# Altium PCB Fibras2Reles.PcbDoc
Units mm, origin at the board's own origin, x right, y up, seen from the top; angles counter-clockwise.
Board outline 87.91 x 91.56 mm, 2 copper layers (Top Layer, Bottom Layer), stack 0.971 mm thick; 75 components, 50 nets, 231 pads, 38 vias.
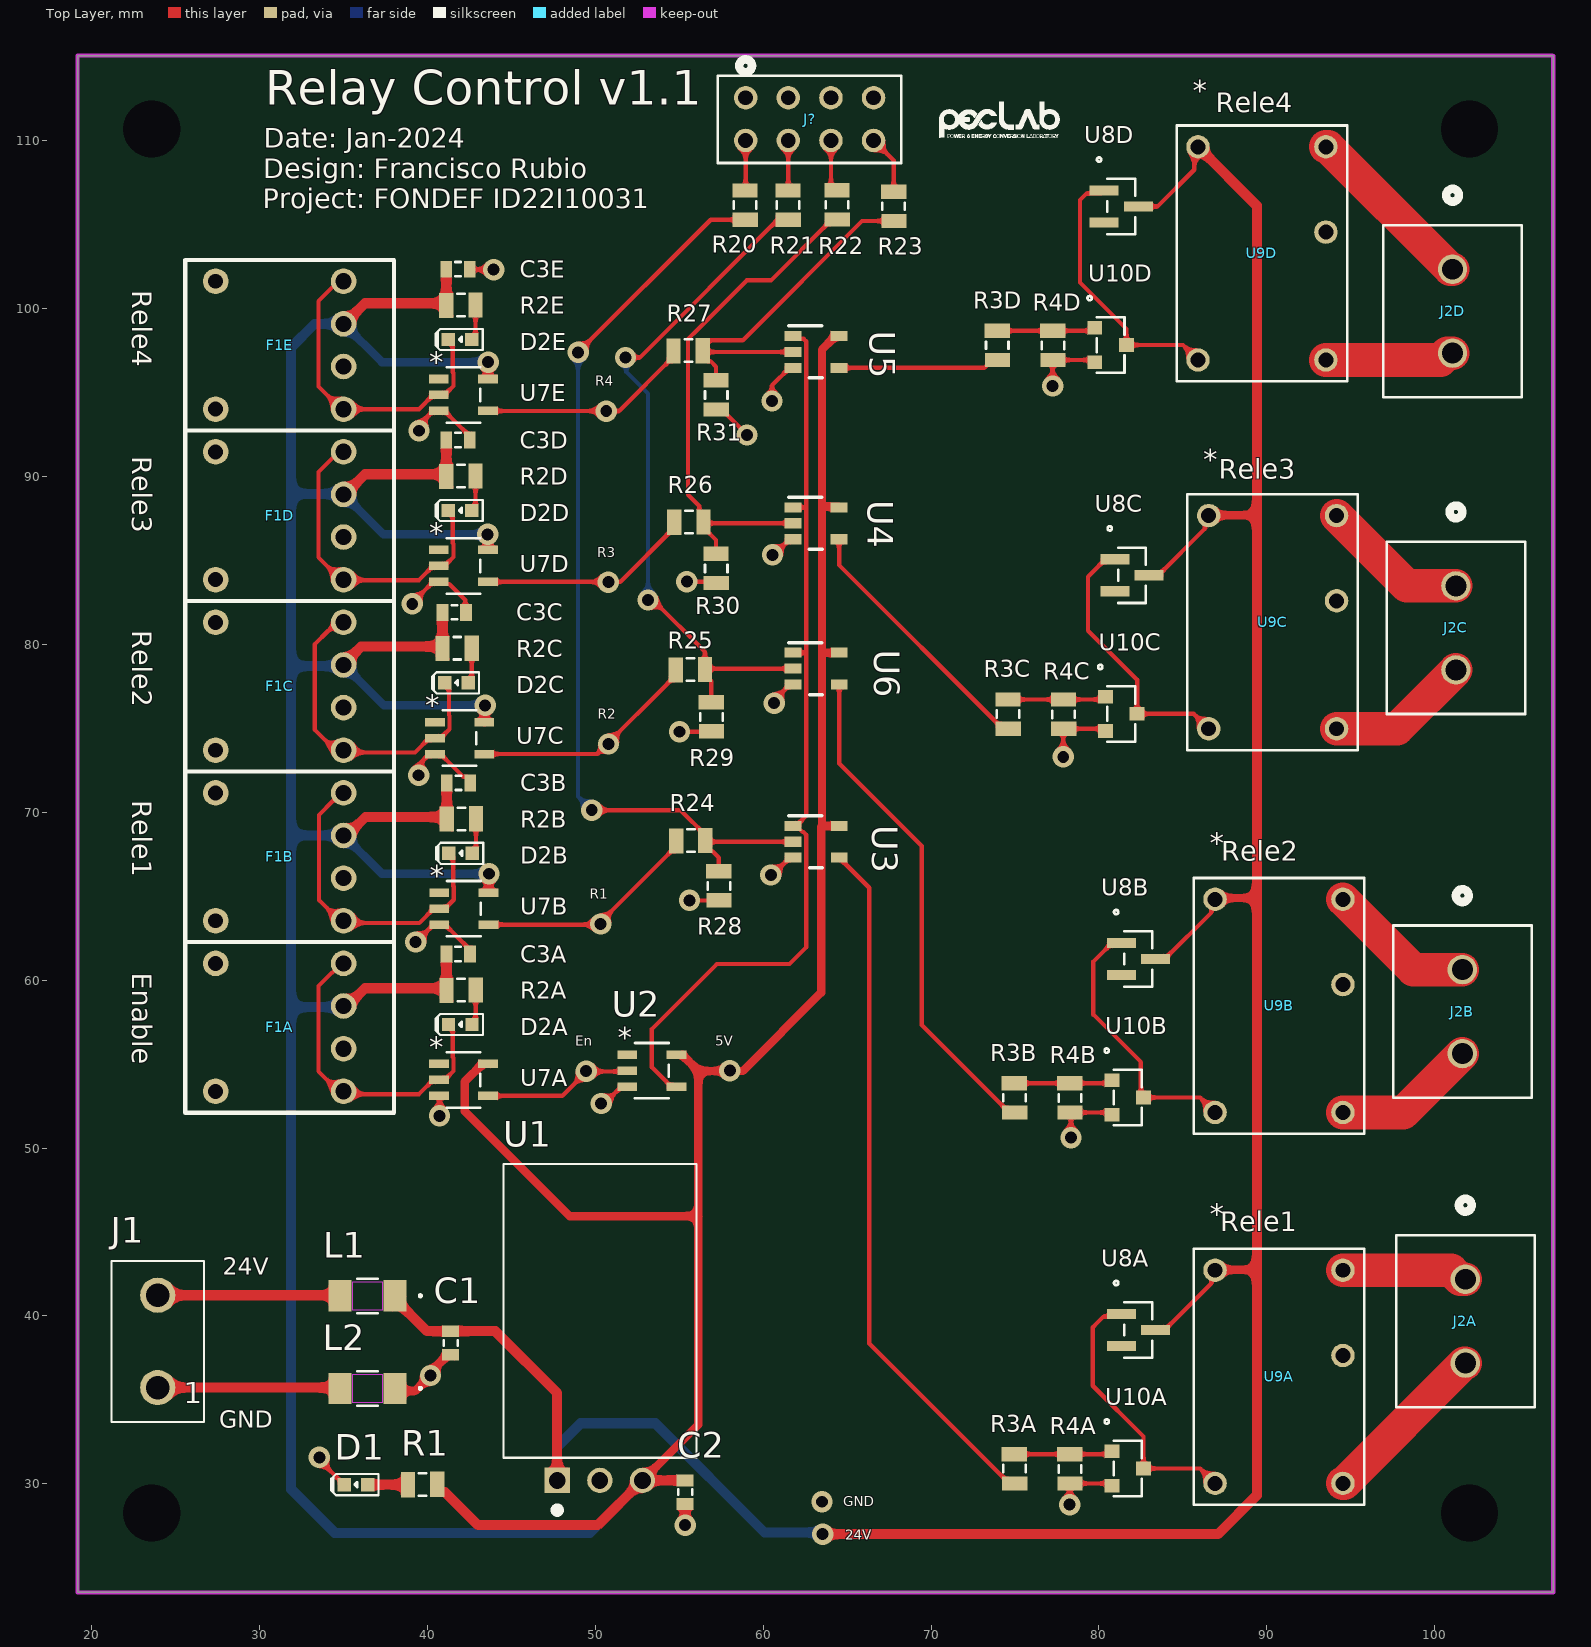
[diagram p0: Top Layer view]
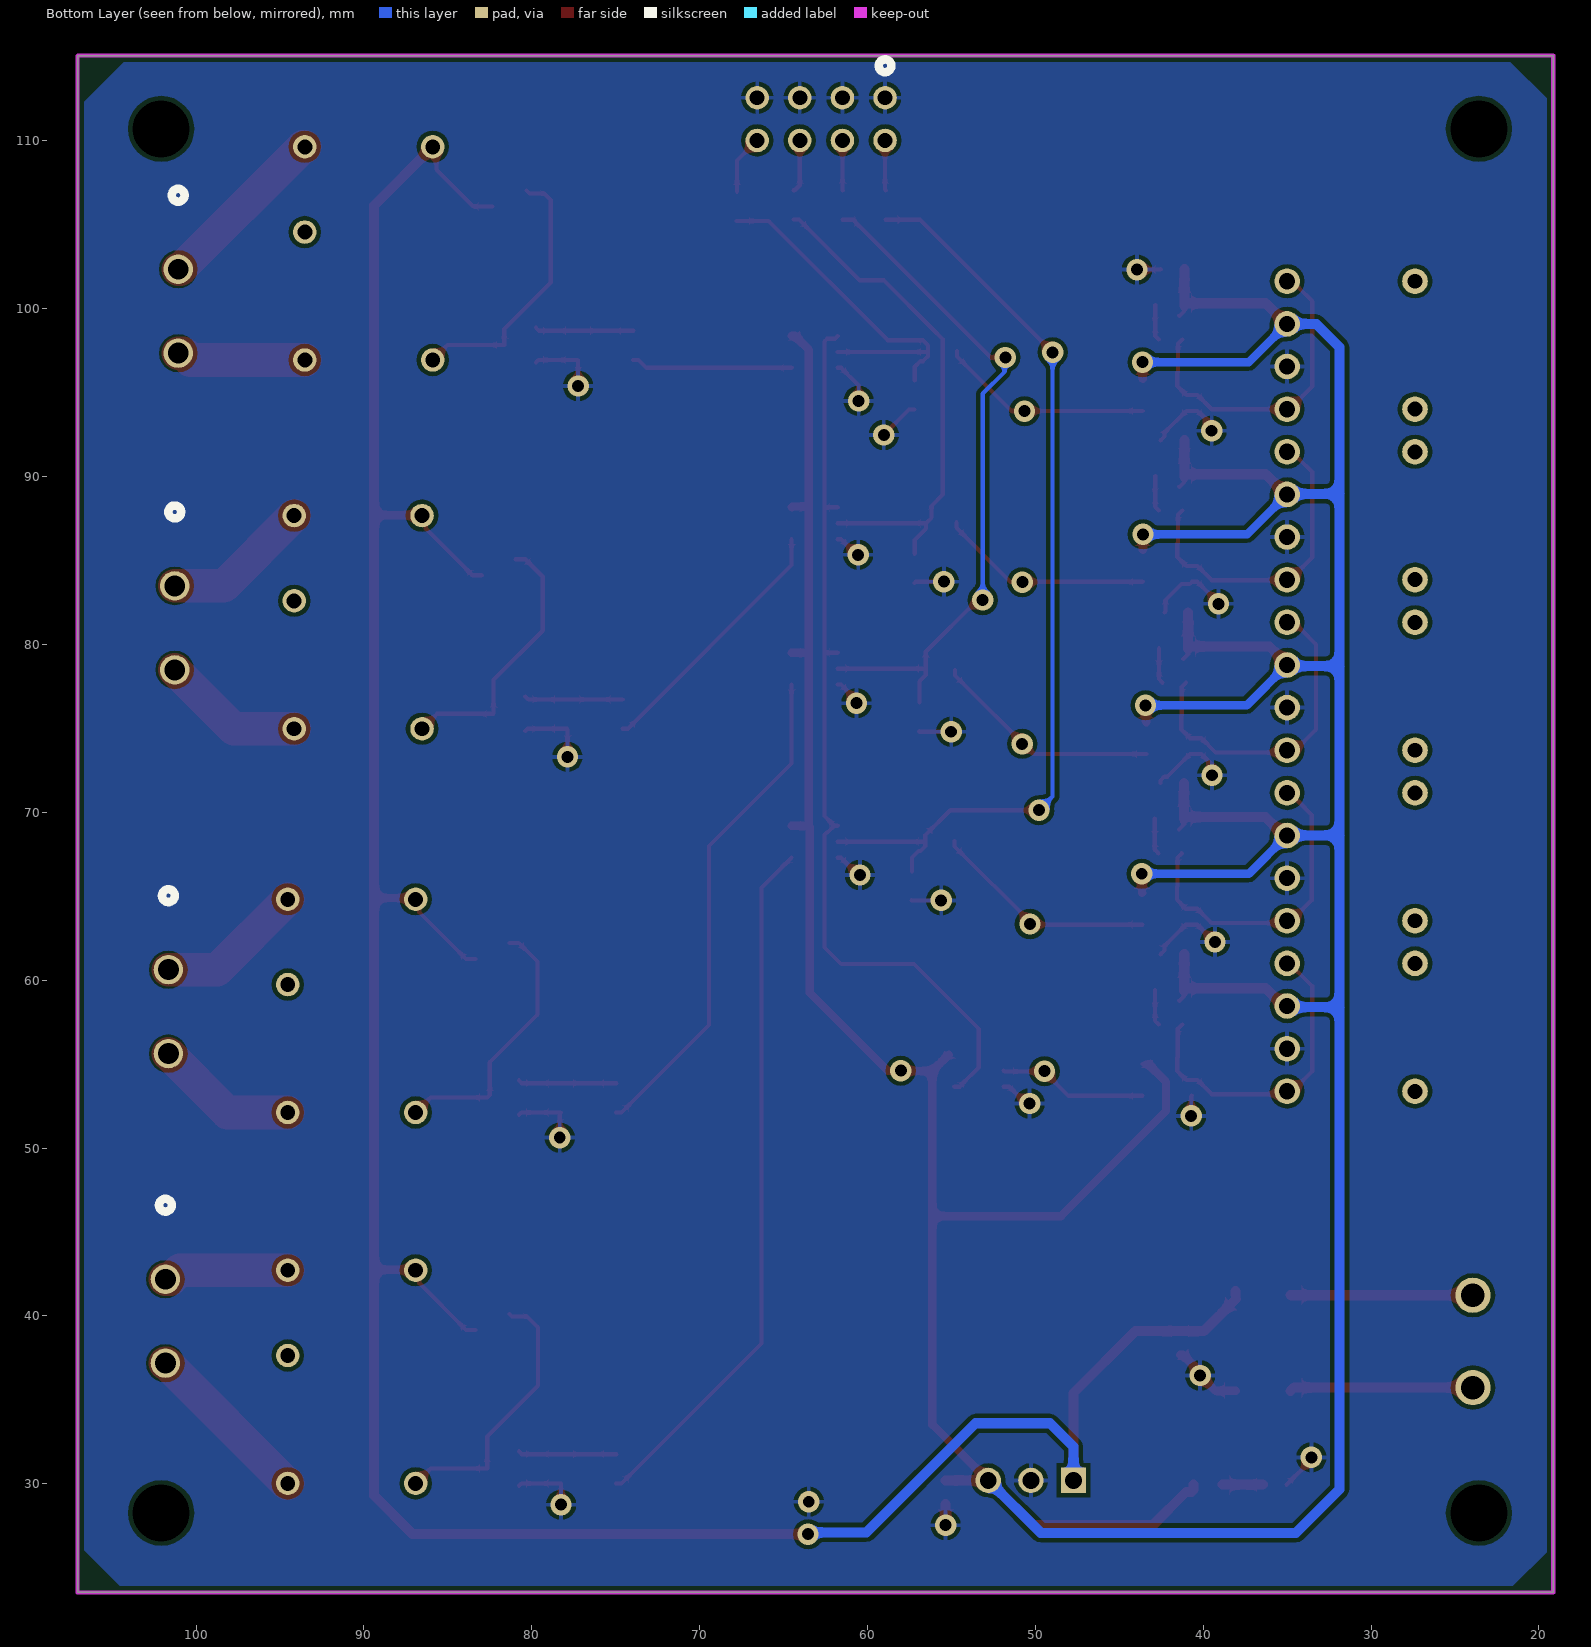
[diagram p1: Bottom Layer view, seen from below]
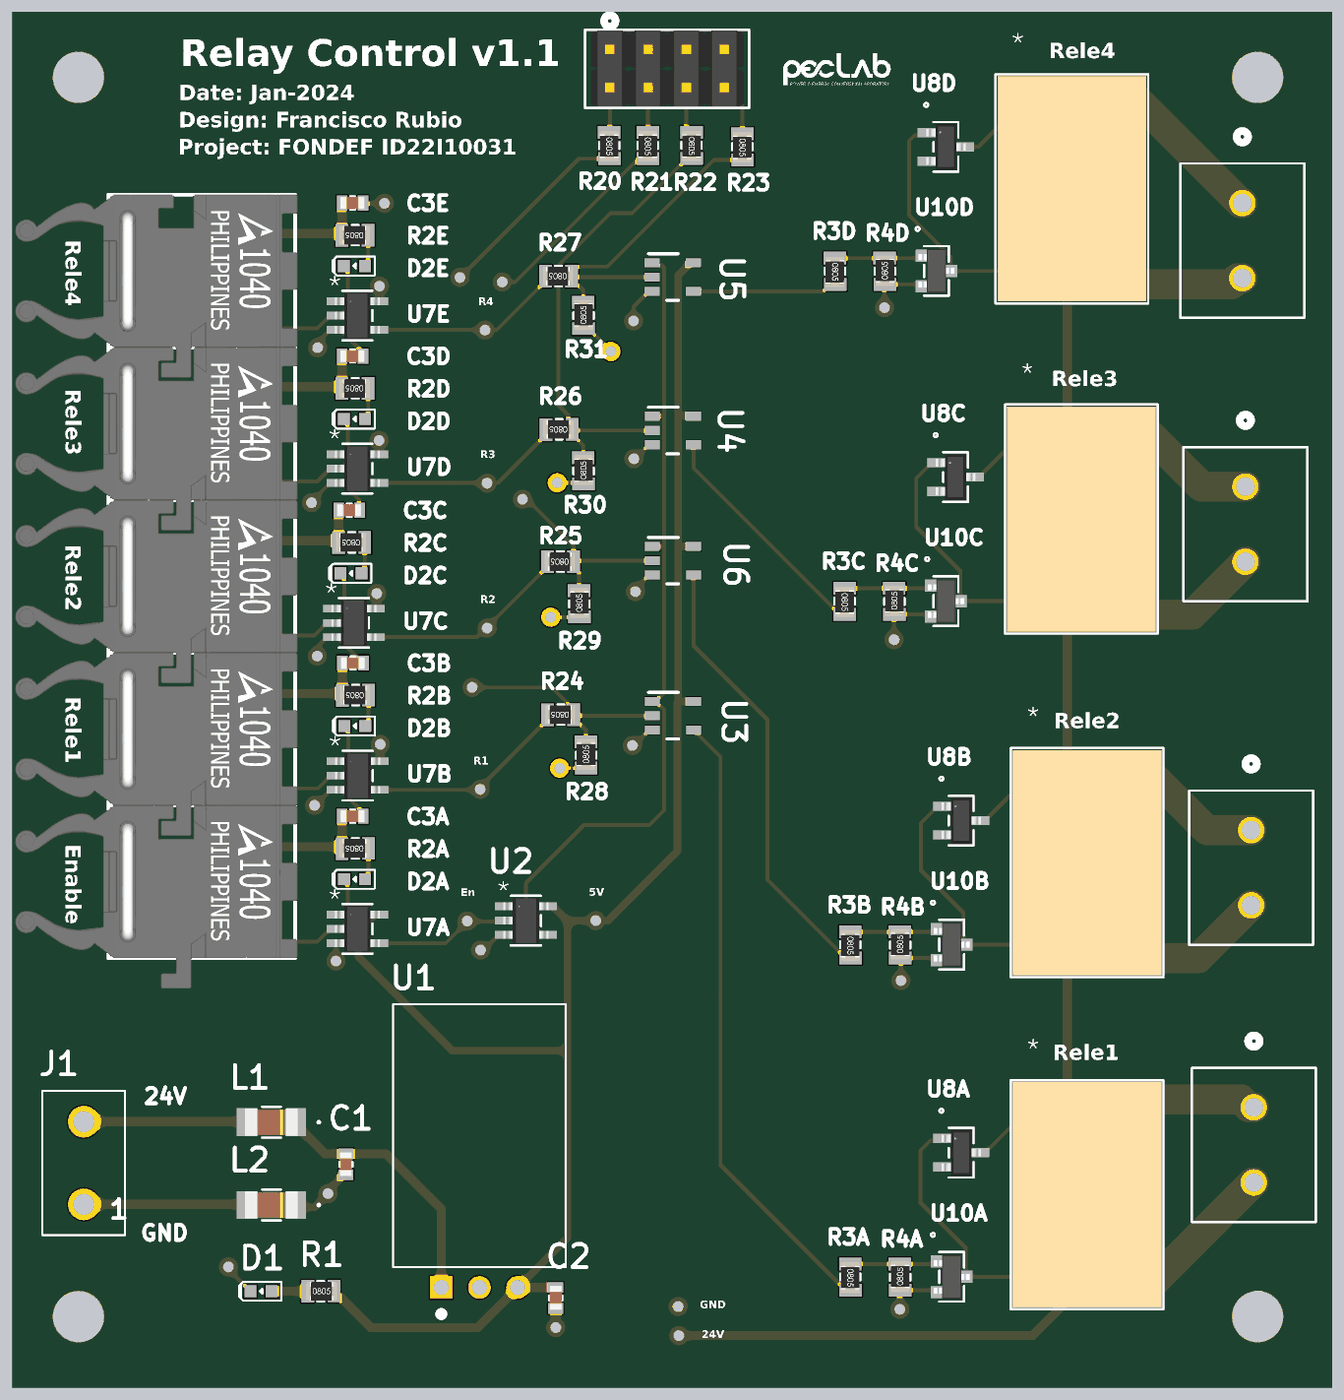
[diagram p2: 3D render of the assembled board from above, using the file's embedded part models]

## Layer stack, top to bottom
Top Solder: solder mask 0.0102, Solder Resist, Dk 3.5
Top Layer: signal copper 0.0356
Dielectric2: dielectric 0.9, FR-4, Dk 4.8
Bottom Layer: signal copper 0.0356
Bottom Solder: solder mask 0.0102, Solder Resist, Dk 3.5

## Board outline
19.152,23.527 19.152,115.087 107.036,115.087 107.061,115.062 107.061,23.527

## Design rules (kind name [scope] priority, off if disabled: settings)
Clearance [All] p1: gap=0.254 ignorepadtopadclearanceinfootprint=FALSE except(0: Arc-Hole Track-Hole SMDPad-Hole THPad-Hole Via-Hole Fill-Hole Poly-Hole Region-Hole Text-Hole; 0.152: Arc-Arc Arc-Track Arc-SMDPad Track-Track Track-SMDPad)
HoleSize [All] p1: absolutevalues=TRUE maxlimit=5 minlimit=0.025 maxpercent=80.000 minpercent=20.000
PolygonConnect [All] p1: connectstyle=Relief reliefconductorwidth=0.254 reliefentries=4 polygonreliefangle="90 Angle" airgapwidth=0.254
RoomDefinition RelesOut4 [InComponentClass('RelesOut4')] p1: confinementstyle=ConfineIn formatcopy=TRUE lockcomponents=FALSE outline 70.028,94.285 105.969,94.285 105.969,114.351 70.028,114.351
RoomDefinition RelesOut3 [InComponentClass('RelesOut3')] p2: confinementstyle=ConfineIn formatcopy=TRUE lockcomponents=FALSE outline 70.663,72.314 106.604,72.314 106.604,92.38 70.663,92.38
RoomDefinition RelesOut2 [InComponentClass('RelesOut2')] p3: confinementstyle=ConfineIn formatcopy=TRUE lockcomponents=FALSE outline 71.044,49.454 106.985,49.454 106.985,69.52 71.044,69.52
RoomDefinition RelesOut1 [InComponentClass('RelesOut1')] p4: confinementstyle=ConfineIn formatcopy=TRUE lockcomponents=FALSE outline 71.044,27.356 106.985,27.356 106.985,47.422 71.044,47.422
RoutingVias [All] p1: holewidth=0.711 width=1.27 viastyle="Through Hole" minholewidth=0.711 minwidth=1.27 maxholewidth=0.711 maxwidth=1.27
SolderMaskExpansion [All] p1: expansion=0.102 istentingtop=FALSE
Width [All] p1: maxlimit=3 minlimit=0.254 preferedwidth=0.5 minimp=50.000000 maximp=50.000000 favimp=50.000000
29 further rules are at their usual default settings.

## Classes and differential pairs
channel class RelesOut: RelesOut1 RelesOut2 RelesOut3 RelesOut4
channel class InputsFibras: InputsFibras1 InputsFibras2 InputsFibras3 InputsFibras4 InputsFibras5
net class Rele_Vgs[1..4]: Rele_Vgs1 Rele_Vgs2 Rele_Vgs3 Rele_Vgs4
net class Relay_Signal[1..5]: Relay_Signal1 Relay_Signal2 Relay_Signal3 Relay_Signal4 Relay_Signal5
component class RelesOut4: J2D R3D R4D U8D U9D U10D
component class RelesOut3: J2C R3C R4C U8C U9C U10C
component class RelesOut2: J2B R3B R4B U8B U9B U10B
component class RelesOut1: J2A R3A R4A U8A U9A U10A
component class InputsFibras5: C3E D2E F1E R2E U7E
component class InputsFibras4: C3D D2D F1D R2D U7D
component class InputsFibras3: C3C D2C F1C R2C U7C
component class InputsFibras2: C3B D2B F1B R2B U7B
component class InputsFibras1: C3A D2A F1A R2A U7A
component class Fibras2Reles: C1 C2 D1 J1 J? L1 L2 R1 R20 R21 R22 R23 R24 R25 R26 R27 R28 R29 R30 R31 U1 U2 U3 U4 U5 U6

## Components (designator, comment, footprint, x,y, rotation, side; value= is the part's Value field where it differs from the comment)
C1 "10uF" CAP_0603 41.377,39.094 r0 top value=100nF
C2 "22uF" CAP_0603 55.347,30.201 r0 top value=100nF
C3A "100nF" CAP_0603 41.128,61.554 r90 top (schematic designator C3)
C3B "100nF" CAP_0603 41.148,71.755 r90 top (schematic designator C3)
C3C "100nF" CAP_0603 40.894,81.915 r90 top (schematic designator C3)
C3D "100nF" CAP_0603 41.123,92.177 r90 top (schematic designator C3)
C3E "100nF" CAP_0603 41.123,102.362 r90 top (schematic designator C3)
D1 "Yellow" LED_0603_Yellow 36.427,29.947 r270 top
D2A "Yellow" LED_0603_Yellow 42.652,57.363 r270 top (schematic designator D2)
D2B "Yellow" LED_0603_Yellow 42.672,67.564 r270 top (schematic designator D2)
D2C "Yellow" LED_0603_Yellow 42.418,77.724 r270 top (schematic designator D2)
D2D "Yellow" LED_0603_Yellow 42.647,87.986 r270 top (schematic designator D2)
D2E "Yellow" LED_0603_Yellow 42.647,98.171 r270 top (schematic designator D2)
F1A "HFBR-2521Z" FO_Rx_HFBR-2521Z 35,53.382 r270 top (schematic designator F1)
F1B "HFBR-2521Z" FO_Rx_HFBR-2521Z 35,63.542 r270 top (schematic designator F1)
F1C "HFBR-2521Z" FO_Rx_HFBR-2521Z 35,73.702 r270 top (schematic designator F1)
F1D "HFBR-2521Z" FO_Rx_HFBR-2521Z 35,83.862 r270 top (schematic designator F1)
F1E "HFBR-2521Z" FO_Rx_HFBR-2521Z 35,94.022 r270 top (schematic designator F1)
J1 "64900221122" 64900221122 23.927,38.481 r0 top
J2A "691111710002" CONN2_710002_WRE 101.829,42.186 r270 top (schematic designator J2)
J2B "691111710002" CONN2_710002_WRE 101.651,60.63 r270 top (schematic designator J2)
J2C "691111710002" CONN2_710002_WRE 101.27,83.49 r270 top (schematic designator J2)
J2D "691111710002" CONN2_710002_WRE 101.067,102.358 r270 top (schematic designator J2)
J? "HTSW-104-07-L-D" CON8_2X4_TU_TSW_SAI 62.763,111.303 r180 top
L1 "FBMJ3216HS800-T" IND_16HS800-T_TAY-M 36.424,41.199 r180 top
L2 "FBMJ3216HS800-T" IND_16HS800-T_TAY-M 36.424,35.687 r180 top
R1 "65" RES_0805 38.837,29.947 r90 top value=10k
R2A "65" RES_0805 42.868,59.415 r270 top value=10k (schematic designator R2)
R2B "65" RES_0805 42.888,69.616 r270 top value=10k (schematic designator R2)
R2C "65" RES_0805 42.634,79.776 r270 top value=10k (schematic designator R2)
R2D "65" RES_0805 42.863,90.038 r270 top value=10k (schematic designator R2)
R2E "65" RES_0805 42.863,100.223 r270 top value=10k (schematic designator R2)
R3A "10" RES_0805 74.961,31.763 r0 top value=10k (schematic designator R3)
R3B "10" RES_0805 74.961,53.861 r0 top value=10k (schematic designator R3)
R3C "10" RES_0805 74.58,76.721 r0 top value=10k (schematic designator R3)
R3D "10" RES_0805 73.945,98.692 r0 top value=10k (schematic designator R3)
R4A "10k" RES_0805 78.283,30.023 r180 top (schematic designator R4)
R4B "10k" RES_0805 78.283,52.121 r180 top (schematic designator R4)
R4C "10k" RES_0805 77.902,74.981 r180 top (schematic designator R4)
R4D "10k" RES_0805 77.267,96.952 r180 top (schematic designator R4)
R20 "0" RES_0805 58.908,107.048 r0 top value=10k
R21 "0" RES_0805 61.473,107.048 r0 top value=10k
R22 "0" RES_0805 64.389,107.061 r0 top value=10k
R23 "0" RES_0805 67.773,106.972 r0 top value=10k
R24 "0" RES_0805 56.553,68.321 r270 top value=10k
R25 "0" RES_0805 56.528,78.506 r270 top value=10k
R26 "0" RES_0805 56.439,87.3 r270 top value=10k
R27 "0" RES_0805 56.401,97.505 r270 top value=10k
R28 "0" RES_0805 57.373,64.757 r180 top value=10k
R29 "0" RES_0805 56.921,74.828 r180 top value=10k
R30 "0" RES_0805 57.201,83.668 r180 top value=10k
R31 "0" RES_0805 57.201,94.005 r180 top value=10k
U1 "V7805-1000R" CONV_V7805-1000R 50.267,40.301 r90 top
U2 "SN74LVC1G14DBVR" DBV5-M 53.365,54.61 r0 top
U3 "SN74LVC1G08DBVR" DBV0005A_N 63.153,68.25 r0 top
U4 "SN74LVC1G08DBVR" DBV0005A_N 63.148,87.224 r0 top
U5 "SN74LVC1G08DBVR" DBV0005A_N 63.144,97.434 r0 top
U6 "SN74LVC1G08DBVR" DBV0005A_N 63.153,78.562 r0 top
U7A "SN74LVC1G14DBVR" DBV5-M 42.144,54.061 r0 top (schematic designator U7)
U7B "SN74LVC1G14DBVR" DBV5-M 42.164,64.262 r0 top (schematic designator U7)
U7C "SN74LVC1G14DBVR" DBV5-M 41.91,74.422 r0 top (schematic designator U7)
U7D "SN74LVC1G14DBVR" DBV5-M 42.139,84.684 r0 top (schematic designator U7)
U7E "SN74LVC1G14DBVR" DBV5-M 42.139,94.869 r0 top (schematic designator U7)
U8A "BAS16LT1G" SOT-23_ONS-M 82.347,39.167 r270 top (schematic designator U8)
U8B "BAS16LT1G" SOT-23_ONS-M 82.347,61.265 r270 top (schematic designator U8)
U8C "BAS16LT1G" SOT-23_ONS-M 81.966,84.125 r270 top (schematic designator U8)
U8D "BAS16LT1G" SOT-23_ONS-M 81.331,106.096 r270 top (schematic designator U8)
U9A "DS1E-M-DC24V" RELAY_DS1E_PAN 86.919,42.723 r0 top (schematic designator U9)
U9B "DS1E-M-DC24V" RELAY_DS1E_PAN 86.919,64.821 r0 top (schematic designator U9)
U9C "DS1E-M-DC24V" RELAY_DS1E_PAN 86.538,87.681 r0 top (schematic designator U9)
U9D "DS1E-M-DC24V" RELAY_DS1E_PAN 85.903,109.652 r0 top (schematic designator U9)
U10A "2N7002-7-F" SOT-23_1_DIO 81.712,30.912 r270 top (schematic designator U10)
U10B "2N7002-7-F" SOT-23_1_DIO 81.712,53.01 r270 top (schematic designator U10)
U10C "2N7002-7-F" SOT-23_1_DIO 81.331,75.87 r270 top (schematic designator U10)
U10D "2N7002-7-F" SOT-23_1_DIO 80.696,97.841 r270 top (schematic designator U10)

## Footprints (in the part's own frame and the unit in brackets; to place one, negate y for a bottom-side part, rotate by r counter-clockwise, add the part's x,y. Pads: shape width x height; smd on the part's side, far side on the other; paste and mask are expansions set on the pad)
64900221122 [mm]
  round 2.1 hole 1.4: 1(0,-2.75) 2(0,2.75)
  silkscreen extent -2.75,-4.8 2.75,4.8
CAP_0603 [mm] "CAP CER 0603"
  rect 1x0.7 smd: 1(0,0) 2(0,-1.4)
  silkscreen extent -0.42,-0.86 0.43,-0.54, body extent -0.4,-1.49 0.4,0.11, height 0.3
CON8_2X4_TU_TSW_SAI [mil]
  round 55 / inner round 60 / far side round 55 hole 35 paste-27.5 mask+0: 1(150,-50) 2(150,50) 3(50,-50) 4(50,50) 5(-50,-50) 6(-50,50) 7(-150,-50) 8(-150,50)
  silkscreen extent -215,-140 215,103, body extent -200,-100 200,100, height 500
CONN2_710002_WRE [mil]
  round 69 / inner round 60 / far side round 69 hole 49 paste-34.5 mask+0: 1(0,0) 2(196.85,0)
  silkscreen extent -189,-163 300,163
CONV_V7805-1000R [mm]
  rect 1.508x1.508 hole 1: 1(-10.1,2.54)
  round 1.508 hole 1: 2(-10.1,0) 3(-10.1,-2.54)
  silkscreen extent -12.07,-5.75 8.75,5.75
DBV5-M [mil]
  rect 46.5x20 smd paste+0 mask+0: 1(-57.75,37.4) 2(-57.75,0) 3(-57.75,-37.4) 4(57.75,-37.4) 5(57.75,37.4)
  silkscreen extent -40,-65 40,65, body extent -59,-60 59,60, height 57
DBV0005A_N [mm]
  rect 1x0.6 smd paste+0 mask+0.051: 1(-1.375,0.95) 2(-1.375,0) 3(-1.375,-0.95) 4(1.375,-0.95) 5(1.375,0.95)
  silkscreen extent -1.63,-1.55 0.38,1.55
FO_Rx_HFBR-2521Z [mil] "RECEIVER FIBER OPTIC 600NM 5MBD"
  round 60 hole 38: 1(0,0) 2(-100,0) 3(-200,0) 4(-300,0)
  round 60 hole 35: 5(-300,-300) 8(0,-300)
  silkscreen extent -350,-371 50,118, body extent -350,-616 130,124, height 306
IND_16HS800-T_TAY-M [mil]
  rect 54x73 smd paste+0 mask+0: 1(-64,0) 2(64,0)
  Top Layer keep-out region: -35,-33.5 -35,33.5 35,33.5 35,-33.5
  silkscreen extent -127,-40 25,40, body extent -69,-36 69,36, height 51
LED_0603_Yellow [mm] "LED 0603"
  rect 0.8x0.8 smd: 1(0,0) 2(0,-1.4)
  silkscreen extent -0.63,-2.16 0.63,0.65, body extent -0.4,-1.46 0.4,0.14, height 0.4
RELAY_DS1E_PAN [mil]
  round 55 / inner round 60 / far side round 55 hole 35 paste-27.5 mask+0: 1(0,0) 6(0,-500) 7(300,-500) 10(300,-200) 12(300,0)
  silkscreen extent -50,-550 350,50, body extent -45,-545 345,45, height 390
RES_0805 [mm] "RES 0805"
  rect 1.5x0.85 smd: 1(0,0) 2(0.02,-1.74)
  silkscreen extent -0.67,-1.08 0.67,-0.64, body extent -0.62,-1.91 0.62,0.09, height 0.45
SOT-23_1_DIO [mil]
  rect 32x35 smd paste+0 mask+0: 1(-40.35,-37.2) 2(40.35,-37.2) 3(0,37.2)
  silkscreen extent -115,-54 65,33, body extent -57,-47 57,47, height 45
SOT-23_ONS-M [mil]
  rect 24x68 smd paste+0 mask+0: 1(-37.5,-40) 2(37.5,-40) 3(0,40)
  silkscreen extent -115,-57 65,33, body extent -60,-52 60,52, height 44

## Part data
C1 C2 C3A C3B C3C C3D C3E: library part Cap_0603, "0.1µF ±10% 50V Ceramic Capacitor X7R 0603 (1608 Metric)", Package=0603, Supplier Part Number 1=399-5089-1-ND, Created=2020_06_15_DAarancibia, MF=KEMET, MFP=C0603C104K5RACTU, Supplier 1=Digi-Key
D1 D2A D2B D2C D2D D2E: library part Led_0603_Yellow, "Yellow 590nm LED Indication - Discrete 2V 0603 (1608 Metric)", Package=0603, Supplier Part Number 1=732-4981-1-ND, Created=2020_07_06_DAarancibia, MF="Würth Elektronik", MFP=150060YS75000, Supplier 1=Digi-Key
F1A F1B F1C F1D F1E: library part FO_Rx_HFBR-2521, "Fiber Optic Receiver  5MBd -43dBm 4.75V ~ 5.25V 10mA", Supplier Part Number 1=516-2062-ND, Created=2020_07_06_DArancibia, MF="Broadcom Limited", MFP=HFBR-2521Z, Supplier 1=Digi-Key
J1: "Connector Header Through Hole 2 position -", Package=None, Availability="In Stock", Check_prices=https://www.snapeda.com/parts/64900221122/Wurth+Elektronik/view-part/?ref=eda, MF="WÃ¼rth Elektronik", MP=64900221122, Price=None, Purchase-URL=https://pricing.snapeda.com/search/part/64900221122/?ref=eda, SnapEDA_Link=https://www.snapeda.com/parts/64900221122/Wurth+Elektronik/view-part/?ref=snap
J2A J2B J2C J2D: "No Description Available", Mfr_Name="Wurth Electronics", Copyright="Copyright (C) 2023 Ultra Librarian. All rights reserved.", Manufacturer_Part_Number=691111710002, RefDes=RefDes, Type=DEV
J?: "No Description Available", Mfr_Name="Samtec Inc", Copyright="Copyright (C) 2023 Ultra Librarian. All rights reserved.", Manufacturer_Part_Number=HTSW-104-07-L-D, RefDes=RefDes, Type=DEV
L1 L2: "No Description Available", Mfr_Name="Taiyo Yuden", Copyright="Copyright (C) 2023 Ultra Librarian. All rights reserved.", Manufacturer_Part_Number=FBMJ3216HS800-T, RefDes=RefDes, Type=DEV
R1 R2A R2B R2C R2D R2E R3A R3B R3C R3D R4A R4B R4C R4D R20 R21 R22 R23 R24 R25 R26 R27 R28 R29 R30 R31: library part Res_0805, "10 kOhms ±1% 0.125W, 1/8W Chip Resistor 0805 (2012 Metric) Automotive AEC-Q200 Thick Film", Package=0805, Supplier Part Number 1=P10.0KCCT-ND, Created=2020_06_15_DAarancibia, MF="Panasonic Electronic Components", MFP=ERJ-6ENF1002V, Supplier 1=Digi-Key
U1: "1 A Output Current, 4.75~32 Vdc Input, Right Angle 3 Pin SIP,  Non-Isolated, Dc-Dc Converter", Package="SIP-3 CUI", CUI_purchase_URL=https://www.cui.com/product/dc-dc-converters/non-isolated/v78-1000r-series?utm_source=snapeda.com&utm_medium=referral&utm_campaign=snapedaBOM, Digi-Key_Part_Number=102-2178-ND, Digi-Key_Purchase_URL=https://www.digikey.com/product-detail/en/cui-inc/V7805-1000R/102-2178-ND/2352137?utm_source=snapeda&utm_medium=aggregator&utm_campaign=symbol, MF="CUI Inc.", MP=V7805-1000R, SnapEDA_Link=https://www.snapeda.com/parts/V7805-1000R/CUI/view-part/2782787/?ref=snap
U2 U7A U7B U7C U7D U7E: "No Description Available", Mfr_Name="Texas Instruments", Copyright="Copyright (C) 2023 Ultra Librarian. All rights reserved.", Manufacturer_Part_Number=SN74LVC1G14DBVR, RefDes=RefDes, Type=DEV
U3 U4 U5 U6: "No Description Available", Alternate_PartNumber=SN74LVC1G08DBVT, Manufacturer="Texas Instruments", CompType=IC, Copyright="Copyright (C) 2023 Ultra Librarian. All rights reserved.", Manufacturer_Part_Number=SN74LVC1G08DBVR, Mfr_Name="Texas Instruments", MountType=SMT, PackageReference=DBV0005A, PartNumber=SN74LVC1G08DBVR, RefDes=RefDes, RoHS=Y, Type=DEV
U8A U8B U8C U8D: "No Description Available", Mfr_Name=onsemi, Copyright="Copyright (C) 2023 Ultra Librarian. All rights reserved.", Manufacturer_Part_Number=BAS16LT1G, RefDes=RefDes, Type=DEV
U9A U9B U9C U9D: "No Description Available", Mfr_Name=Panasonic, Copyright="Copyright (C) 2023 Ultra Librarian. All rights reserved.", Manufacturer_Part_Number=DS1E-M-DC24V, RefDes=RefDes, Type=DEV
U10A U10B U10C U10D: "No Description Available", Mfr_Name="Diodes Inc", RefDes=RefDes, Type=Type

## Free pads (board coordinates)
  round 1.524 hole 3.4: 1(23.571,28.261) 1(23.571,110.719) 1(102.083,28.261) 1(102.083,110.719)

## Via types
v1: diameter 1.27, hole 0.711, Top Layer to Bottom Layer, tented both sides, 26 vias
v2: diameter 1.27, hole 0.711, Top Layer to Bottom Layer, 12 vias

## Nets (pads, with @x,y where several pads share a name; then routed paths per layer and width w, separated by ;. In a path a pad name is that pad's centre, name@x,y a point inside that pad or via, vN(x,y) a via of type N, cw(c..) or ccw(c..) an arc to the next point about the centre after c; other vN are vias at no path point)
5V: C2.1 C3A.1 C3B.1 C3C.1 C3D.1 C3E.1 F1A.3 F1B.3 F1C.3 F1D.3 F1E.3 R1.2 R2A.2 R2B.2 R2C.2 R2D.2 R2E.2 U1.3 U2.5 U3.5 U4.5 U5.5 U6.5 U7A.5 U7B.5 U7C.5 U7D.5 U7E.5 | length 314.1
  Top Layer w0.254: R2C.2 40.894,79.431 R2C.2@41.192,79.133 ; R2D.2 41.123,89.693 R2D.2@41.421,89.395 ; R2E.2 41.123,99.878 R2E.2@41.421,99.58 ; R2A.2 41.128,59.07 R2A.2@41.426,58.772 ; R2B.2 41.148,69.271 R2B.2@41.446,68.973 ; U7A.5@43.147,55.138 43.274,55.011 U7A.5
  Top Layer w0.5: U7A.5@43.274,55.011 42.215,53.951 42.215,52.197 48.463,45.949 56.134,45.949 ; U7C.5 43.401,75.372 43.405,75.376 43.405,76.349 v1(43.434,76.378) ; v1(43.586,86.563) 43.596,86.554 43.596,85.638 43.6,85.634 U7D.5 ; U7E.5 43.609,95.822 43.609,96.822 v1(43.612,96.825) ; U7B.5 43.643,65.212 43.647,65.216 43.647,66.329 v1(43.663,66.345) ; U1.3 56.134,33.528 56.134,45.949 ; U2.5@55.169,55.56 56.134,54.595 ; 63.567,69.25 63.5,69.317 63.5,79.553 ; U5.5 64.319,98.384 63.5,97.565 63.5,88.24 ; U4.5 64.473,88.224 63.516,88.224 63.5,88.24 ; U3.5 63.517,69.2 63.449,69.132 63.449,59.258 58.786,54.595 56.134,54.595 ; U6.5 63.541,79.512 63.5,79.553 ; 56.134,45.949 56.134,54.595 ; 63.5,79.553 63.5,88.24
  Top Layer w0.6: F1C.3@34.818,78.654 36.047,79.883 40.769,79.883 R2C.2@40.894,79.758 ; F1D.3@35.047,88.916 36.276,90.145 40.998,90.145 R2D.2@41.123,90.02 ; F1E.3@35.047,99.101 36.276,100.33 40.998,100.33 R2E.2@41.123,100.205 ; F1A.3@35.052,58.293 36.281,59.522 41.003,59.522 R2A.2@41.128,59.397 ; F1B.3@35.072,68.494 36.301,69.723 41.023,69.723 R2B.2@41.148,69.598 ; R1.2 40.577,29.642 40.702,29.517 41.027,29.517 43.01,27.534 50.14,27.534 U1.3 C2.1 ; R2C.2 R2C.2@40.894,79.758 ; C3C.1 R2C.2@40.894,79.758 ; R2D.2 R2D.2@41.123,90.02 ; C3D.1 R2D.2@41.123,90.02 ; R2E.2 R2E.2@41.123,100.205 ; C3E.1 R2E.2@41.123,100.205 ; R2A.2 R2A.2@41.128,59.397 ; C3A.1 R2A.2@41.128,59.397 ; R2B.2 R2B.2@41.148,69.598 ; C3B.1 R2B.2@41.148,69.598
  Bottom Layer w0.5: F1B.3 37.277,66.345 v1(43.663,66.345) ; F1C.3 37.404,76.378 v1(43.434,76.378) ; F1D.3 37.379,86.563 v1(43.586,86.563) ; F1E.3 37.277,96.825 v1(43.612,96.825)
  Bottom Layer w0.6: F1A.3 34.933,58.395 31.877,58.395 ; F1B.3 34.991,68.631 31.877,68.631 ; F1C.3 34.933,78.715 31.877,78.715 ; F1D.3 34.966,88.976 31.877,88.976 ; F1E.3 33.265,99.102 31.877,97.714 31.877,88.976 ; U1.3 49.682,27.076 34.468,27.076 31.877,29.667 31.877,58.395 ; 31.877,58.395 31.877,68.631 ; 31.877,68.631 31.877,78.715 ; 31.877,78.715 31.877,88.976
  other v2: 58.014,54.61
+24V: J1.2 L1.2 | length 10.9
  Top Layer w0.6: J1.2 34.779,41.231 L1.2@34.798,41.25
+24V_Filtered: C1.1 L1.1 U1.1 U8A.3 U8B.3 U8C.3 U8D.3 U9A.1 U9B.1 U9C.1 U9D.1 | length 176.9
  Top Layer w0.254: U8D.3 83.49,106.096 85.684,108.29 85.684,109.433 U9D.1 ; U8C.3 83.541,84.125 86.319,86.903 86.319,87.462 U9C.1 ; U8A.3 83.922,39.167 86.7,41.945 86.7,42.504 U9A.1 ; U8B.3 83.922,61.265 86.7,64.043 86.7,64.602 U9B.1
  Top Layer w0.5: U9C.1 86.563,87.706 89.408,87.706 ; U9A.1 86.944,42.748 89.408,42.748 ; U9B.1 86.995,64.897 89.408,64.897
  Top Layer w0.6: L1.1@38.049,41.008 39.964,39.094 C1.1 44.041,39.094 47.727,35.408 U1.1 ; L1.1@38.075,41.237 L1.1@38.075,41.478 ; v2(63.541,26.997) 87.093,26.997 89.408,29.312 89.408,42.748 89.408,64.897 89.408,87.706 89.408,106.147 U9D.1
  Bottom Layer w0.6: U1.1 47.727,32.207 49.124,33.604 53.569,33.604 60.071,27.102 63.436,27.102 v2(63.541,26.997)
AGND: C1.2 C2.2 C3A.2 C3B.2 C3C.2 C3D.2 C3E.2 D1.2 F1A.2 F1B.2 F1C.2 F1D.2 F1E.2 J?.1 J?.3 J?.5 J?.7 L2.1 R4A.1 R4B.1 R4C.1 R4D.1 R28.1 R29.1 R30.1 R31.1 U1.2 U2.3 U3.3 U4.3 U5.3 U6.3 U7A.3 U7B.3 U7C.3 U7D.3 U7E.3 U10A.2 U10B.2 U10C.2 U10D.2 | length 63.5
  Top Layer w0.254: v1(33.553,31.572) 33.553,31.42 D1.2 ; v1(39.091,82.423) 39.091,82.489 40.335,83.734 U7D.3 40.799,83.607 41.29,83.607 42.25,82.647 42.25,81.959 C3C.2 ; v1(39.294,62.281) 39.329,62.281 40.361,63.312 U7B.3 41.034,63.312 42.305,62.041 42.305,61.777 C3A.2 ; v1@39.548,72.06 39.548,72.136 v1(39.472,72.212) 39.472,72.837 40.107,73.472 U7C.3 40.78,73.472 42.124,72.128 42.325,72.128 42.548,71.905 C3B.2 ; v1@39.573,92.558 39.573,92.659 v1(39.497,92.735) 39.691,92.93 39.691,93.275 40.335,93.919 U7E.3 41.008,93.919 42.3,92.628 42.3,92.4 C3D.2 ; U7A.3 40.716,53.072 v1(40.716,51.918) ; C3E.2 42.548,102.337 v1(43.942,102.337) ; v1(50.343,52.654) 50.556,52.654 51.562,53.66 U2.3 ; v2(55.016,74.803) 56.896,74.803 R29.1 ; v2(55.448,83.744) 57.125,83.744 R30.1 ; v2(55.61,64.755) 57.371,64.755 R28.1 ; R31.1 57.526,94.005 59.03,92.502 v2(59.03,92.481) ; v1(60.452,66.269) 60.547,66.269 61.578,67.3 U3.3 ; v1(60.528,94.513) 60.528,95.443 61.569,96.484 U5.3 ; v1(60.554,85.344) 60.643,85.344 61.573,86.274 U4.3 ; v1(60.655,76.505) 60.655,76.689 61.578,77.612 U6.3 ; v1(77.241,95.402) 77.241,96.926 R4D.1 79.615,96.952 U10D.2 ; v1(77.876,73.304) 77.876,74.955 R4C.1 80.25,74.981 U10C.2 ; v1(78.257,28.753) 78.257,29.997 R4A.1 80.631,30.023 U10A.2 ; v1(78.334,50.622) 78.334,52.07 R4B.1 80.631,52.121 U10B.2
  Top Layer w0.5: L2.1@38.049,35.535 39.268,35.535 v1(40.183,36.449) 40.183,36.65 41.227,37.694 C1.2
  Top Layer w0.6: v1(55.347,27.534) C2.2
  other v2: 63.5,28.931
EN_In_Vgs: U2.4 U3.1 U4.1 U5.1 U6.1 | length 54.8
  Top Layer w0.254: U2.4 54.496,53.66 54.369,53.787 54.369,53.813 53.365,54.816 53.365,57.099 57.236,60.97 61.57,60.97 62.558,61.958 62.558,68.666 62.394,68.829 62.349,68.829 U3.1@61.978,69.2 ; U5.1 61.942,98.211 62.409,98.211 62.558,98.063 62.558,88.163 ; U4.1 62.548,88.174 62.558,88.163 ; U3.1 U3.1@61.978,69.2 ; U6.1 62.548,79.512 62.558,79.502 ; U3.1@61.978,69.2 62.558,69.779 62.558,79.502 ; 62.558,79.502 62.558,88.163
GND: J1.1 L2.2 | length 11
  Top Layer w0.6: J1.1 34.602,35.731 L2.2@34.798,35.535
NetD1_1: D1.1 R1.1 | length 2.4
  Top Layer w0.6: D1.1 R1.1
NetD2A_1: D2A.1 R2A.1 | length 2.1
  Top Layer w0.254: D2A.1 42.868,57.579 R2A.1
NetD2A_2: D2A.2 F1A.1 F1A.4 U7A.2 | length 19.2
  Top Layer w0.254: F1A.4@35.052,60.833 34.708,60.833 34.334,60.459 34.318,60.459 33.508,59.649 33.508,54.569 34.864,53.213 35.052,53.213 39.493,53.213 40.341,54.061 41.014,54.061 41.547,54.594 41.547,55.381 41.509,55.419 41.509,57.106 D2A.2
NetD2B_1: D2B.1 R2B.1 | length 2.1
  Top Layer w0.254: D2B.1 42.888,67.78 R2B.1
NetD2B_2: D2B.2 F1B.1 F1B.4 U7B.2 | length 19.2
  Top Layer w0.254: F1B.4@35.072,71.034 34.728,71.034 34.354,70.66 34.338,70.66 33.528,69.85 33.528,64.77 34.884,63.414 35.072,63.414 39.513,63.414 40.361,64.262 41.034,64.262 41.567,64.795 41.567,65.582 41.529,65.62 41.529,67.307 D2B.2
NetD2C_1: D2C.1 R2C.1 | length 2.1
  Top Layer w0.254: D2C.1 42.634,77.94 R2C.1
NetD2C_2: D2C.2 F1C.1 F1C.4 U7C.2 | length 19.2
  Top Layer w0.254: F1C.4@34.818,81.194 34.474,81.194 34.1,80.82 34.084,80.82 33.274,80.01 33.274,74.93 34.63,73.574 34.818,73.574 39.259,73.574 40.107,74.422 40.78,74.422 41.313,74.955 41.313,75.742 41.275,75.78 41.275,77.467 D2C.2
NetD2D_1: D2D.1 R2D.1 | length 2.1
  Top Layer w0.254: D2D.1 42.863,88.202 R2D.1
NetD2D_2: D2D.2 F1D.1 F1D.4 U7D.2 | length 19.2
  Top Layer w0.254: F1D.4@35.047,91.456 34.703,91.456 34.329,91.081 34.312,91.081 33.503,90.272 33.503,85.192 34.859,83.836 35.047,83.836 39.487,83.836 40.335,84.684 41.008,84.684 41.542,85.217 41.542,86.003 41.504,86.041 41.504,87.729 D2D.2
NetD2E_1: D2E.1 R2E.1 | length 2.1
  Top Layer w0.254: D2E.1 42.863,98.387 R2E.1
NetD2E_2: D2E.2 F1E.1 F1E.4 U7E.2 | length 19.2
  Top Layer w0.254: F1E.4@35.047,101.641 34.703,101.641 34.329,101.267 34.312,101.267 33.503,100.457 33.503,95.377 34.859,94.021 35.047,94.021 39.487,94.021 40.335,94.869 41.008,94.869 41.542,95.402 41.542,96.189 41.504,96.227 41.504,97.914 D2E.2
NetJ2A_1: J2A.1 U9A.12 | length 7.5
  Top Layer w2: U9A.12 100.98,42.723 101.517,42.186 J2A.1
NetJ2A_2: J2A.2 U9A.7 | length 10.3
  Top Layer w2: U9A.7 94.602,30.023 101.765,37.186 J2A.2
NetJ2B_1: J2B.1 U9B.12 | length 8.8
  Top Layer w2: U9B.12 98.73,60.63 J2B.1
NetJ2B_2: J2B.2 U9B.7 | length 8.6
  Top Layer w2: U9B.7 98.142,52.121 J2B.2
NetJ2C_1: J2C.1 U9C.12 | length 8.8
  Top Layer w2: U9C.12 98.349,83.49 J2C.1
NetJ2C_2: J2C.2 U9C.7 | length 8.6
  Top Layer w2: U9C.7 97.761,74.981 J2C.2
NetJ2D_1: J2D.1 U9D.12 | length 10.6
  Top Layer w2: U9D.12 93.648,109.652 100.941,102.358 J2D.1
NetJ2D_2: J2D.2 U9D.7 | length 7.7
  Top Layer w2: U9D.7 100.348,96.952 100.755,97.358 J2D.2
NetJ?_2: J?.2 R20.1 | length 3
  Top Layer w0.254: R20.1 58.953,107.094 J?.2
NetJ?_4: J?.4 R21.1 | length 3
  Top Layer w0.254: R21.1 61.493,107.068 J?.4
NetJ?_6: J?.6 R22.1 | length 3.2
  Top Layer w0.254: J?.6 64.033,107.359 64.331,107.061 R22.1
NetJ?_8: J?.8 R23.1 | length 3.6
  Top Layer w0.254: J?.8 67.773,108.834 R23.1
NetR3A_1: R3A.1 R4A.2 U10A.1 | length 5.9
  Top Layer w0.254: R3A.1 R4A.2 80.593,31.763 U10A.1
NetR3B_1: R3B.1 R4B.2 U10B.1 | length 5.9
  Top Layer w0.254: R3B.1 R4B.2 80.593,53.861 U10B.1
NetR3C_1: R3C.1 R4C.2 U10C.1 | length 5.9
  Top Layer w0.254: R3C.1 R4C.2 80.212,76.721 U10C.1
NetR3D_1: R3D.1 R4D.2 U10D.1 | length 5.9
  Top Layer w0.254: R3D.1 R4D.2 79.577,98.692 U10D.1
NetU8A_1: U8A.1 U9A.6 U10A.3 | length 16.3
  Top Layer w0.254: U8A.1 81.182,39.971 80.28,39.971 79.892,39.582 79.629,39.319 79.629,35.839 82.657,32.812 U10A.3 86.03,30.912 U9A.6
NetU8B_1: U8B.1 U9B.6 U10B.3 | length 16.1
  Top Layer w0.254: U8B.1 80.772,62.217 79.667,61.112 79.667,57.95 82.499,55.118 82.499,53.167 U10B.3 86.03,53.01 U9B.6
NetU8C_1: U8C.1 U9C.6 U10C.3 | length 16
  Top Layer w0.254: U8C.1 80.391,85.077 79.35,84.036 79.35,80.823 82.276,77.897 U10C.3 85.649,75.87 U9C.6
NetU8D_1: U8D.1 U9D.6 U10D.3 | length 16.1
  Top Layer w0.254: U8D.1 80.137,106.87 79.261,106.87 78.867,106.477 78.867,101.575 81.641,98.801 U10D.3 85.014,97.841 U9D.6
R2: R20.2 R24.1 R28.2 U3.2 | length 56
  Top Layer w0.254: v1(48.971,97.409) 56.871,105.308 R20.2 ; v1(49.784,70.129) 55.069,70.129 56.553,68.646 R24.1 ; R28.2 57.353,67.303 56.959,67.698 56.851,67.698 56.553,67.996 R24.1 ; U3.2 56.624,68.25 R24.1
  Bottom Layer w0.254: v1(48.971,97.409) 48.971,70.942 v1(49.784,70.129)
R3: R21.2 R25.1 R29.2 U6.2 | length 41.2
  Top Layer w0.254: v1(51.791,97.104) 52.654,97.104 60.858,105.308 R21.2 ; v1(53.137,82.652) 53.442,82.652 56.528,79.565 R25.1 ; R29.2 56.901,77.807 56.528,78.181 R25.1 ; U6.2 56.584,78.562 R25.1
  Bottom Layer w0.254: v1(51.791,97.104) 51.845,97.05 51.845,96.237 53.137,94.945 v1(53.137,82.652)
R4: R22.2 R26.1 R30.2 U4.2 | length 30.6
  Top Layer w0.254: R30.2 57.181,86.233 56.515,86.899 R26.1@56.515,87.224 ; U4.2 R26.1@56.515,87.224 ; R22.2 64.084,105.321 60.46,101.697 59.022,101.697 56.083,98.758 55.524,98.199 55.524,88.925 56.191,88.258 56.191,87.547 R26.1 R26.1@56.515,87.224
R5: R23.2 R27.1 R31.2 U5.2 | length 22.4
  Top Layer w0.254: R31.2 57.181,96.551 56.85,96.882 56.699,96.882 56.401,97.18 R27.1 ; U5.2 56.472,97.434 R27.1 ; R23.2 65.89,105.232 58.786,98.128 56.699,98.128 56.401,97.83 R27.1
Relay_Signal1: U2.2 U7A.4 | length 8.9
  Top Layer w0.254: U7A.4 48.031,53.111 49.479,54.559 51.848,54.559 U2.2
  other v2: 49.454,54.585
Relay_Signal2: R24.2 U7B.4 | length 13.4
  Top Layer w0.254: U7B.4 50.15,63.312 54.813,67.976 R24.2
  other v2: 50.317,63.348
Relay_Signal3: R25.2 U7C.4 | length 13.7
  Top Layer w0.254: U7C.4 50.099,73.472 54.788,78.161 R25.2
  other v2: 50.784,74.077
Relay_Signal4: R26.2 U7D.4 | length 12.8
  Top Layer w0.254: U7D.4 51.478,83.734 54.699,86.955 R26.2
  other v2: 50.775,83.718
Relay_Signal5: R27.2 U7E.4 | length 12.7
  Top Layer w0.254: U7E.4 51.42,93.919 54.661,97.16 R27.2
  other v2: 50.648,93.904
Rele_Vgs1: R3A.2 U3.4 | length 41.8
  Top Layer w0.254: U3.4 66.319,65.509 66.319,38.359 74.656,30.023 R3A.2
Rele_Vgs2: R3B.2 U6.4 | length 30
  Top Layer w0.254: U6.4 64.528,72.911 69.443,67.996 69.443,57.333 74.656,52.121 R3B.2
Rele_Vgs3: R3C.2 U4.4 | length 15.7
  Top Layer w0.254: U4.4 64.523,84.733 74.275,74.981 R3C.2
Rele_Vgs4: R3D.2 U5.4 | length 9.6
  Top Layer w0.254: U5.4 73.172,96.484 73.64,96.952 R3D.2
pads on no net: F1A.5 F1A.8 F1B.5 F1B.8 F1C.5 F1C.8 F1D.5 F1D.8 F1E.5 F1E.8 U2.1 U7A.1 U7B.1 U7C.1 U7D.1 U7E.1 U8A.2 U8B.2 U8C.2 U8D.2 U9A.10 U9B.10 U9C.10 U9D.10

## Polygon pours and split planes (outlines as drawn)
AGND on Bottom Layer "AGND_L02_P000" (solid, pour order 0): 21.768,23.698 19,26.466 19,112 22,115 104,115 107,112 107,26.355 104.343,23.698

## Keep-outs
Keep-Out Layer:
  lines w0.254: 19.152,23.527 107.061,23.527 107.061,25.527 107.061,115.062 107.036,115.087 19.152,115.087 19.152,25.527 19.152,23.527

## Silkscreen, mask and mechanical layers (free items; w line width, h text height)
Top Overlay:
  drawing of 37 lines, arcs and shapes, not listed
  text "Relay Control v1.1" at 30.347,111.477 h3.5
  text "Rele4" at 86.966,111.316 h2
  text "Date: Jan-2024" at 30.248,109.21 h2
  text "Design: Francisco Rubio" at 30.223,107.4 h2
  text "Project: FONDEF ID22I10031" at 30.197,105.596 h2
  text "Rele4" at 22.035,101.121 h2 r270
  text "R4" at 49.998,95.197 h1
  text "Rele3" at 22.035,91.215 h2 r270
  text "Rele3" at 87.144,89.498 h2
  text "R3" at 50.125,85.005 h1
  text "Rele2" at 22.035,80.852 h2 r270
  text "R2" at 50.134,75.367 h1
  text "Rele1" at 22.035,70.717 h2 r270
  text "Rele2" at 87.296,66.739 h2
  text "R1" at 49.667,64.641 h1
  text "Enable" at 22.035,60.455 h2 r270
  text "5V" at 57.13,55.9 h1
  text "En" at 48.804,55.878 h1
  text "Rele1" at 87.22,44.667 h2
  text "24V" at 27.788,42.443 h1.02
  text "GND" at 27.584,33.35 h1.02
  text "GND" at 64.753,28.44 h1
  text "24V" at 64.877,26.461 h1

## Dimensions
107.061,23.527 to 107.036,115.087 on Mechanical 1
19.152,23.527 to 107.061,23.527 on Mechanical 1

## Text inside footprints (layer, text, board x,y; h text height)
J1: Top Overlay "1" at 25.492,34.806 h1.27; Mechanical 13 "2" at 25.492,40.686 h1.27; Mechanical 13 "1" at 25.492,34.806 h1.27
U2: Top Overlay "*" at 51.327,55.941 h1.27; Mechanical 13 "*" at 52.426,54.976 h1.27
U7A: Top Overlay "*" at 40.106,55.392 h1.27; Mechanical 13 "*" at 41.204,54.427 h1.27
U7B: Top Overlay "*" at 40.126,65.593 h1.27; Mechanical 13 "*" at 41.224,64.628 h1.27
U7C: Top Overlay "*" at 39.872,75.753 h1.27; Mechanical 13 "*" at 40.97,74.788 h1.27
U7D: Top Overlay "*" at 40.1,86.015 h1.27; Mechanical 13 "*" at 41.199,85.049 h1.27
U7E: Top Overlay "*" at 40.1,96.2 h1.27; Mechanical 13 "*" at 41.199,95.235 h1.27
U9A: Top Overlay "*" at 86.601,45.432 h1.27; Mechanical 13 "*" at 86.601,43.146 h1.27
U9B: Top Overlay "*" at 86.601,67.53 h1.27; Mechanical 13 "*" at 86.601,65.244 h1.27
U9C: Top Overlay "*" at 86.22,90.39 h1.27; Mechanical 13 "*" at 86.22,88.104 h1.27
U9D: Top Overlay "*" at 85.585,112.361 h1.27; Mechanical 13 "*" at 85.585,110.075 h1.27